# Altium PCB Pcb_SpectrumAnalyzer.PcbDoc
Units mil, origin at the board's own origin, x right, y up, seen from the top; angles counter-clockwise.
Board outline 10400 x 2900 mil, 2 copper layers (Top Layer, Bottom Layer); 75 components, 69 nets, 239 pads, 0 vias.
Unrouted connection lines stored in the file: 162.
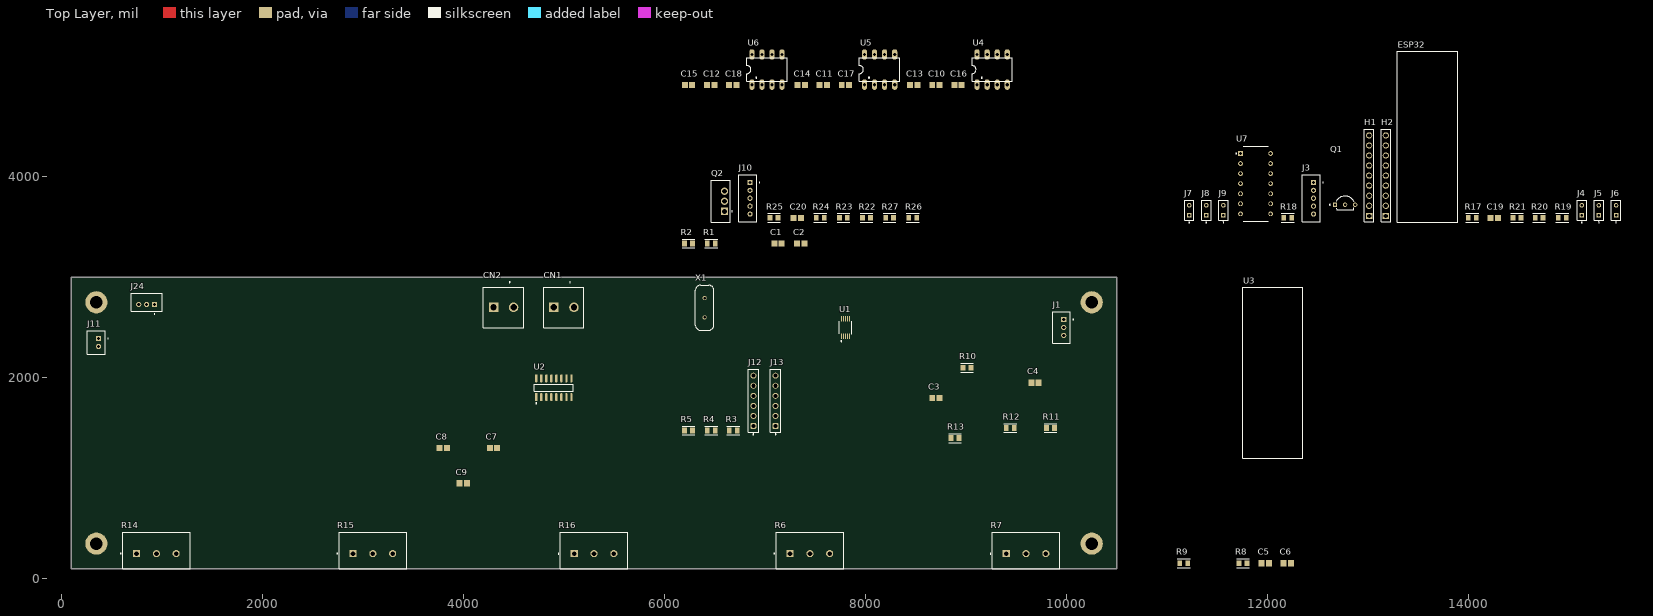
[diagram p0: Top Layer view]
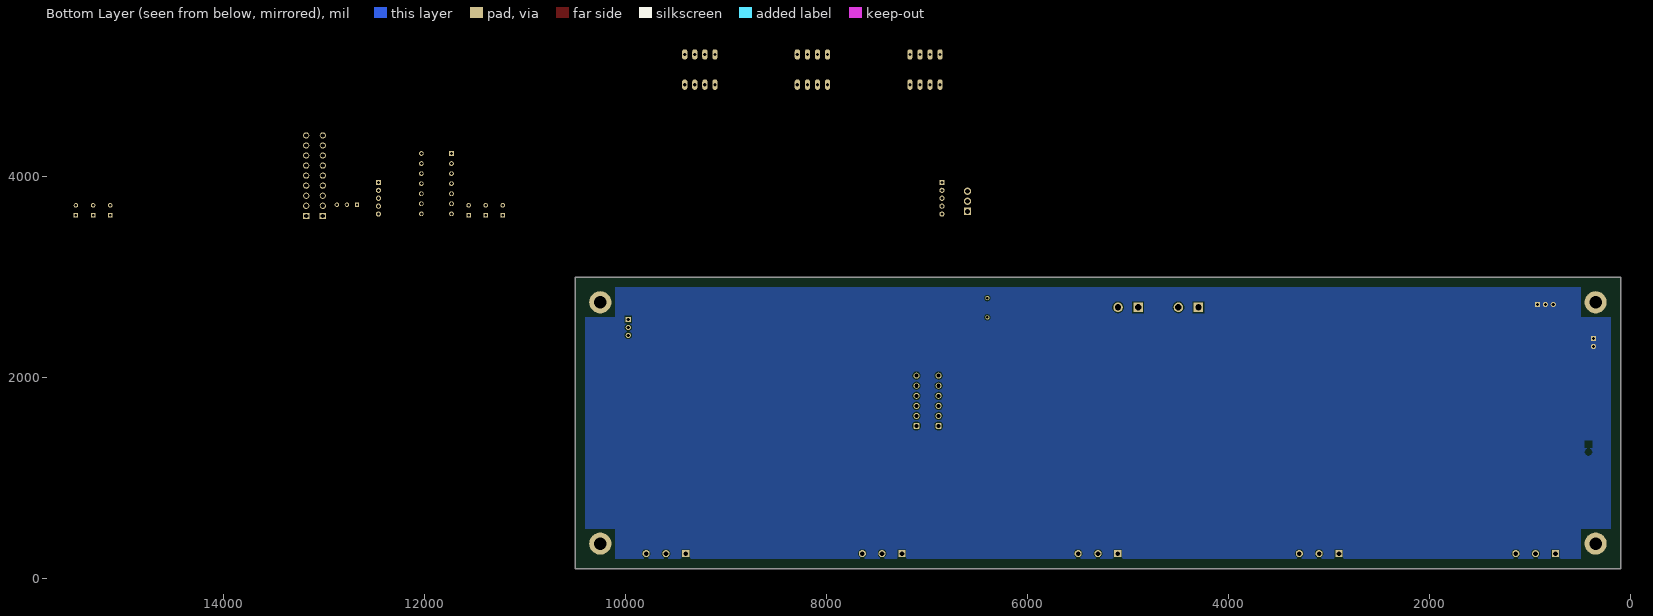
[diagram p1: Bottom Layer view, seen from below]

## Layer stack, top to bottom
Top Solder: solder mask 0.4, Solder Resist, Dk 3.5
Top Layer: signal copper 1.4
Dielectric 1: dielectric 12.6, FR-4, Dk 4.8
Bottom Layer: signal copper 1.4
Bottom Solder: solder mask 0.4, Solder Resist, Dk 3.5

## Board outline
100,100 10500,100 10500,3000 100,3000

## Design rules (kind name [scope] priority, off if disabled: settings)
Clearance [All] p1: gap=10 ignorepadtopadclearanceinfootprint=FALSE
PolygonConnect [All] p1: connectstyle=Relief reliefconductorwidth=10 reliefentries=4 polygonreliefangle="90 Angle" airgapwidth=10
RoutingVias [All] p1: holewidth=28 width=50 viastyle="Through Hole" minholewidth=28 minwidth=50 maxholewidth=28 maxwidth=50
SolderMaskExpansion [All] p1: expansion=4 istentingtop=FALSE
SupplyNets "Schematic Supply Nets_3" [InNet('3.3V')] p1: voltage=0.000
SupplyNets "Schematic Supply Nets_2" [InNet('AGND')] p2: voltage=0.000
SupplyNets "Schematic Supply Nets_1" [InNet('5V-MAIN')] p3: voltage=0.000
SupplyNets "Schematic Supply Nets" [InNet('5V')] p4: voltage=0.000
Width [All] p1: maxlimit=10 minlimit=10 preferedwidth=10
30 further rules are at their usual default settings.

## Classes and differential pairs
component class SpectrumAnalyzer: C10 C11 C12 C13 C14 C15 C16 C17 C18 U4 U5 U6
component class ESP32-Controls: C19 C20 ESP32 H1 H2 J3 J4 J5 J6 J7 J8 J9 J10 J11 J24 Q1 Q2 R14 R15 R16 R17 R18 R19 R20 R21 R22 R23 R24 R25 R26 R27 U7
component class ClockGenerator: C1 C2 R1 R2 U1 X1
component class BluetoothModule: J12 J13 R3 R4 R5 U3
component class AudioFrontend: C3 C4 C5 C6 C7 C8 C9 CN1 CN2 J1 R6 R7 R8 R9 R10 R11 R12 R13 U2

## Components (designator, comment, footprint, x,y, rotation, side; value= is the part's Value field where it differs from the comment)
C1 "470nF" SMD_CAPACITOR 7130,3335 r0 top
C2 "470nF" SMD_CAPACITOR 7355,3335 r0 top
C3 "0.47µF" SMD_CAPACITOR 8700,1800 r0 top
C4 "0.47µF" SMD_CAPACITOR 9686.42,1950 r0 top
C5 "0.1µF" SMD_CAPACITOR 11975,155 r0 top
C6 "1µF" SMD_CAPACITOR 12195,155 r0 top
C7 "1µF" SMD_CAPACITOR 4300,1300 r0 top
C8 "470µF" SMD_CAPACITOR 3800,1300 r0 top
C9 "1µF" SMD_CAPACITOR 4000,950 r0 top
C10 "100nF" SMD_CAPACITOR 8700,4910 r0 top
C11 "100nF" SMD_CAPACITOR 7580,4910 r0 top
C12 "100nF" SMD_CAPACITOR 6460,4910 r0 top
C13 "100nF" SMD_CAPACITOR 8480,4910 r0 top
C14 "100nF" SMD_CAPACITOR 7360,4910 r0 top
C15 "100nF" SMD_CAPACITOR 6240,4910 r0 top
C16 "10nF" SMD_CAPACITOR 8920,4910 r0 top
C17 "10nF" SMD_CAPACITOR 7800,4910 r0 top
C18 "10nF" SMD_CAPACITOR 6680,4910 r0 top
C19 "0.1µF" SMD_CAPACITOR 14255,3590 r0 top
C20 "0.1µF" SMD_CAPACITOR 7320,3590 r0 top
CN1 "1714955" SchroefConnector2P 4900,2700 r0 top
CN2 "1714955" SchroefConnector2P 4300,2700 r0 top
ESP32 "ESP32_Placeholder" ESP32_placeholder 13290,3545 r90 top
H1 "HeaderFemale9P" Header-9pins 13010,3610 r90 top
H2 "HeaderFemale9P" Header-9pins 13175,3610 r90 top
J1 "B3B-PH-K-S" Connector3P 9950,2500 r90 top
J3 "Mode_Button_RGB" Connector5P 12435,3785 r90 top
J4 "B" MaleHeader2P 15125,3665 r0 top
J5 "G" MaleHeader2P 15295,3665 r0 top
J6 "R" MaleHeader2P 15465,3665 r0 top
J7 "B" MaleHeader2P 11220,3665 r0 top
J8 "G" MaleHeader2P 11390,3665 r0 top
J9 "R" MaleHeader2P 11560,3665 r0 top
J10 "POWER_Button_BGR" Connector5P 6830,3785 r90 top
J11 "USB-C Connector" JST_B2B-PH-K-S 350,2350 r90 top
J12 "" HEADER-6PINS 6885,1770 r90 top
J13 "61300611821" HEADER-6PINS 7105,1770 r90 top
J24 "B3B-PH-K-S" Connector3P 850,2750 r0 top
Q1 "BC547C" Transistor 12770,3720 r0 top
Q2 "IRLZ44N" MOSFET 6560,3755 r90 top
R1 "10K" SMD_RESISTOR 6465,3335 r0 top value=681Ω
R2 "10K" SMD_RESISTOR 6240,3335 r0 top value=681Ω
R3 "51K" SMD_RESISTOR 6685,1475 r0 top value=681Ω
R4 "33K" SMD_RESISTOR 6465,1475 r0 top value=681Ω
R5 "10K" SMD_RESISTOR 6240,1475 r0 top value=681Ω
R6 "10K" POTENTIOMETER 7446.85,250 r0 top
R7 "10K" POTENTIOMETER 9596.85,250 r0 top
R8 "10K" SMD_RESISTOR 11755,155 r0 top value=681Ω
R9 "10K" SMD_RESISTOR 11165,155 r0 top value=681Ω
R10 "20K" SMD_RESISTOR 9010.55,2100 r0 top value=681Ω
R11 "20K" SMD_RESISTOR 9839.45,1500 r0 top value=681Ω
R12 "10K" SMD_RESISTOR 9439.45,1500 r0 top value=681Ω
R13 "10K" SMD_RESISTOR 8889.45,1400 r0 top value=681Ω
R14 "10K" POTENTIOMETER 946.85,250 r0 top
R15 "10K" POTENTIOMETER 3100,250 r0 top
R16 "10K" POTENTIOMETER 5300,250 r0 top
R17 "20K" SMD_RESISTOR 14035,3590 r0 top value=681Ω
R18 "1K" SMD_RESISTOR 12200,3590 r0 top value=681Ω
R19 "330" SMD_RESISTOR 14930,3590 r0 top value=681Ω
R20 "220" SMD_RESISTOR 14700,3590 r0 top value=681Ω
R21 "220" SMD_RESISTOR 14480,3590 r0 top value=681Ω
R22 "330" SMD_RESISTOR 8010,3590 r0 top value=681Ω
R23 "220" SMD_RESISTOR 7780,3590 r0 top value=681Ω
R24 "220" SMD_RESISTOR 7550,3590 r0 top value=681Ω
R25 "20K" SMD_RESISTOR 7090,3590 r0 top value=681Ω
R26 "100" SMD_RESISTOR 8470,3590 r0 top value=681Ω
R27 "100K" SMD_RESISTOR 8240,3590 r0 top value=681Ω
U1 "SI5351A-B-GTR" ClockGenerator 7800,2500 r90 top
U2 "PAM8403DR" PAM8403 4900,1900 r90 top
U3 "m18 BT audio in" ESP32_placeholder 12350,2900 r270 top
U4 "MSGEQ7" MSGEQ7 9260,5065 r0 top
U5 "MSGEQ7" MSGEQ7 8140,5065 r0 top
U6 "MSGEQ7" MSGEQ7 7020,5065 r0 top
U7 "74HC74N" 74HC74 11880,3930 r0 top
X1 "ABM8W-25.0000MHZ-8-D1X-T3" Crystal 6400,2696.06 r90 top

## Footprints (in the part's own frame and the unit in brackets; to place one, negate y for a bottom-side part, rotate by r counter-clockwise, add the part's x,y. Pads: shape width x height; smd on the part's side, far side on the other; paste and mask are expansions set on the pad)
74HC74 [mm] "DIP762W45P254L1950H420Q14"
  rect 1.19x1.19 hole 0.79: 1(-3.81,7.62)
  round 1.19 hole 0.79: 2(-3.81,5.08) 3(-3.81,2.54) 4(-3.81,0) 5(-3.81,-2.54) 6(-3.81,-5.08) 7(-3.81,-7.62) 8(3.81,-7.62) 9(3.81,-5.08) 10(3.81,-2.54) 11(3.81,0) 12(3.81,2.54) 13(3.81,5.08) 14(3.81,7.62)
  silkscreen extent -5,-9.51 3.17,9.51, body extent -4.72,-9.51 4.72,9.51, height 4.2
ClockGenerator [mm] "FP-SI5351A-B-GTR-MFG"
  rect 1.4x0.3 smd paste+0 mask+0: 1(-2.2,1) 2(-2.2,0.5) 3(-2.2,0) 4(-2.2,-0.5) 5(-2.2,-1) 6(2.2,-1) 7(2.2,-0.5) 8(2.2,0) 9(2.2,0.5) 10(2.2,1)
  silkscreen extent -3.57,-1.6 1.6,1.6, body extent -3,-1.7 3,1.7, height 0.25
Connector3P [mm] "JST_B3B-PH-K-S"
  rect 1.308x1.308 / inner round 1.308 / far side rect 1.308x1.308 hole 0.8: 1(2,-0.55)
  round 1.308 hole 0.8: 2(0,-0.55) 3(-2,-0.55)
  silkscreen extent -3.95,-3.05 3.95,2.25
Connector5P [mm] "JST_B5B-PH-K-S"
  rect 1.308x1.308 / inner round 1.308 / far side rect 1.308x1.308 hole 0.8: 1(4,-0.55)
  round 1.308 hole 0.8: 2(2,-0.55) 3(0,-0.55) 4(-2,-0.55) 5(-4,-0.55)
  silkscreen extent -5.95,-3.05 5.95,2.25
Crystal [mm] "XTAL_ECS250204XFDN"
  round 1.03 hole 0.63: 1(-2.44,0) 2(2.44,0)
  silkscreen extent -5.68,-2.33 5.68,2.33, body extent -5.68,-2.32 5.68,2.32, height 3.5
ESP32_placeholder [mil]
  silkscreen extent 0,-600 1700,0
HEADER-6PINS [mm] "Socket Header, Pitch 2.54 mm, THT, Vertical, single row, 6p"
  rrect50% 1.52x1.52 hole 1.02: 1(-6.35,0)
  round 1.52 hole 1.02: 2(-3.81,0) 3(-1.27,0) 4(1.27,0) 5(3.81,0) 6(6.35,0)
  silkscreen extent -8.6,-1.35 8,1.35, body extent -7.87,-1.25 7.87,1.25, height 8.55
Header-9pins [mm] "SMTC-SSW-112-01-X-S   SQ Post Socket, 1x12 Pins, Vertical, 2.54mm Pitch, Female"
  rect 1.55x1.55 hole 1.04: 1(0,0)
  round 1.55 hole 1.04: 2(2.54,0) 3(5.08,0) 4(7.62,0) 5(10.16,0) 6(12.7,0) 7(15.24,0) 8(17.78,0) 9(20.32,0)
  silkscreen extent -1.53,-1.2 21.84,1.2, body extent -1.55,-1.22 21.87,1.22, height 5
JST_B2B-PH-K-S [mm]
  rect 1.308x1.308 / inner round 1.308 / far side rect 1.308x1.308 hole 0.8: 1(1,-0.55)
  round 1.308 hole 0.8: 2(-1,-0.55)
  silkscreen extent -2.95,-3.05 2.95,2.25, body extent -2.95,-2.25 2.95,2.25, height 6
MaleHeader2P [mil] "SAMTEC_TD-101-X-A"
  rect 45x45 / inner round 45 / far side rect 45x45 hole 25: 01(0,-50)
  round 45 hole 25: 02(0,50)
  silkscreen extent -47,-124 47,100
MOSFET [mm] "TO254P1054X469X1930-3"
  rect 1.85x1.85 / inner round 1.85 / far side rect 1.85x1.85 hole 1.23: 1(-2.54,-0.94)
  round 1.85 hole 1.23: 2(0,-0.94) 3(2.54,-0.94)
  silkscreen extent -5.27,-2.96 5.27,2.35, body extent -5.08,-2.67 5.08,1.78, height 15.01
MSGEQ7 [mil] "DIL-08"
  oval 52x104 hole 32: 1(-150,-150) 2(-50,-150) 3(50,-150) 4(150,-150) 5(150,150) 6(50,150) 7(-50,150) 8(-150,150)
  silkscreen extent -200,-115 200,115
PAM8403 [mil] "FP-SO-16-IPC_B"
  rect 81.77x22.92 smd paste+0 mask+0: 1(-93.21,175)
  rrect100% 81.77x22.92 smd paste+0 mask+0: 2(-93.21,125) 3(-93.21,75) 4(-93.21,25) 5(-93.21,-25) 6(-93.21,-75) 7(-93.21,-125) 8(-93.21,-175) 9(93.21,-175) 10(93.21,-125) 11(93.21,-75) 12(93.21,-25) 13(93.21,25) 14(93.21,75) 15(93.21,125) 16(93.21,175)
  silkscreen extent -159,-195 33,195, body extent -144,-205 144,205, height 10
POTENTIOMETER [mm] "TRIM_WH148-1A-2-18T-L20"
  rect 1.8x1.8 / inner round 1.8 / far side rect 1.8x1.8 hole 1.2 mask+0.102: 1(-5,0)
  round 1.8 hole 1.2 mask+0.102: 2(0,0) 3(5,0)
  silkscreen extent -9.1,-3.8 8.5,5.4, body extent -8.5,-23.8 8.5,5.4, height 21
SchroefConnector2P [mm] "CUI_TB004-508-02BE"
  rect 2.4x2.4 / inner round 2.4 / far side rect 2.4x2.4 hole 1.6 mask+0.102: 1(0,0)
  round 2.4 hole 1.6 mask+0.102: 2(5.08,0)
  silkscreen extent -2.54,-5.1 7.62,6.45, body extent -2.59,-5.12 8.17,5.08, height 14.1
SMD_CAPACITOR [mm] "CAPC2013X145X48ML20T23Chip Capacitor, 2-Leads, Body 2.00x1.25mm, IPC Low Density"
  rect 1.5x1.55 smd: 1(-0.925,0) 2(0.925,0)
  body extent -1.1,-0.72 1.1,0.72, height 1.45
SMD_RESISTOR [mil] "FP-RT0805-IPC_A"
  rect 47.56x57.56 smd paste+0 mask+0: 1(-39.45,0) 2(39.45,0)
  silkscreen extent -63,-45 63,45, body extent -83,-48 83,48, height 10
Transistor [mm] "TRANS_BC547C"
  rect 1.108x1.108 / inner round 1.108 / far side rect 1.108x1.108 hole 0.6 mask+0.102: 1(-2.54,0)
  round 1.108 hole 0.6 mask+0.102: 2(0,0) 3(2.54,0)
  silkscreen extent -3.94,-1.27 2.2,2.33, body extent -2.74,-4.6 2.74,12.5, height 2.3

## Part data
C1 C2 C3 C4 C5 C6 C7 C8 C9 C10 C11 C12 C13 C14 C15 C16 C17 C18 C19 C20: library part "CER Capacitor", Manufacturer=Vitramon, Part Number=VJ0805Y682KXAMT
CN1 CN2: library part "schroefconnector 2 pins", "PC Terminal Block, Pitch 6.35 mm, 1 x 2 Position, Height 21.5 mm, Tail Lenght 5.1 mm, RoHS, Bulk", Manufacturer="Phoenix Contact", Package Description="PC Terminal Block, Pitch 6.35 mm, 1 x 2 Position, Height 21.5 mm, Tail Lenght 5.1 mm", Datasheet URL=http://media.digikey.com/pdf/Data%20Sheets/Phoenix%20Contact%20PDFs/1714955.pdf, Datasheet Version=02/2010, Manufacturer URL=http://www.phoenixcontact.com/, Mounting Technology=ThroughHole, Package Reference=1714955
J1 J24: library part Connector_3p, Package=None, Availability=Unavailable, MF="{'manufacturer': u'JST Sales America Inc.'}", MP=B3B-PH-K-S, Price=None
J3 J10: library part Connector_5p, "B5B-PH-K-S", Package=None, Availability=Unavailable, MF="{'manufacturer': u'JST Sales America Inc.'}", MP=B5B-PH-K-S, Price=None
J4 J5 J6 J7 J8 J9: library part Header_Male2p, "Variable Height PCB Header Strips, 0.100 pitch", Package=None, Check_prices=https://www.snapeda.com/parts/MTSW-101-09-L-D-210/Samtec/view-part/?ref=eda, MF=SAMTEC, MP=MTSW-101-09-L-D-210, SnapEDA_Link=https://www.snapeda.com/parts/MTSW-101-09-L-D-210/Samtec/view-part/?ref=snap
J11: library part Connector_2p, "Connector Header Through Hole 2 position 0.079 (2.00mm)B2B-PH-K-S", Package=None, Check_prices=https://www.snapeda.com/parts/B2B-PH-K-S/JST/view-part/?ref=eda, MF="JST Sales America Inc.", MP=B2B-PH-K-S, SnapEDA_Link=https://www.snapeda.com/parts/B2B-PH-K-S/JST/view-part/?ref=snap
J12 J13: library part Header_female6P, "THT Vertical Socket Header WR-PHD, Pitch 2.54 mm, Single Row, 6 pins", Contact Resistance=20mΩ, Current Rating=3A, Operating Supply Voltage=250V, Gender=Female, Lead Pitch=2.54mm, Number of Pins=6, Orientation=Vertical, RoHS=Compliant
Q1: "BJT, TO-92, 45V, 100mA, NPN, 0.5W, 150Â°C", Package=TO-92, Availability=Unavailable, Check_prices=https://www.snapeda.com/parts/BC547C/Diotec/view-part/?ref=eda, MF="Diotec Semiconductor", MP=BC547C, Price=None, SnapEDA_Link=https://www.snapeda.com/parts/BC547C/Diotec/view-part/?ref=snap
Q2: "N-Channel 55 V 47A (Tc) 3.8W (Ta), 110W (Tc) Surface Mount D2PAK", Package="TO-220-3 Infineon / IR", Availability="Not in stock", Check_prices=https://www.snapeda.com/parts/IRLZ44N/Infineon/view-part/?ref=eda, MF="Infineon / IR", MP=IRLZ44N, Price=None, SnapEDA_Link=https://www.snapeda.com/parts/IRLZ44N/Infineon/view-part/?ref=snap
R1 R2 R3 R4 R5 R8 R9 R10 R11 R12 R13 R17 R18 R19 R20 R21 R22 R23 R24 R25 R26 R27: library part Resistor, "RES SMD 681 OHM 0.1% 1/8W 0805", Manufacturer=Yageo, Manufacturer Part Number=RT0805BRD07681RL, Package=RT0805, Power Rating=0.125W, Resistance=681Ω, Temperature="-55°C to +155°C", Temperature Coefficient="25 ppm/°C", Temperature Range High=+155°C, Temperature Range Low=-55°C, Tolerance=0.0025, Voltage Rating=150V, Automotive=No, Category=Res, ComponentLink2Description=Datasheet, ComponentLink2URL=http://www.yageo.com/documents/recent/PYu-RT_1-to-0.01_RoHS_L_9.pdf, Composition="Thin Film", Device Class L1="Passive Components", Device Class L2=Resistors, Device Class L3="Chip SMD Resistors", Digikey Description="RES SMD 681 OHM 0.1% 1/8W 0805", Footprint Url=http://www.yageo.com/exep/pages/download/literatures/PYu-R_Mount_10.pdf, Height=0.6mm, Ipc Land Pattern Name=RESC200125X50, Lead Free=Yes, Mouser Description="Thin Film Resistors - SMD 1/8W 681 ohm .1% 25ppm", Octopart=https://octopart.com/rt0805brd07681rl-yageo-1270194, RoHS=TRUE, Series=RT
R6 R7 R14 R15 R16: library part Potmeter, "16mm Rotary Potentiometers / WH148-1A-2-18T-L20", Package=Package, Check_prices=https://www.snapeda.com/parts/WH148-1A-2-18T-L20/Kls+electronics/view-part/?ref=eda, MF="Kls electronics", MP=WH148-1A-2-18T-L20, SnapEDA_Link=https://www.snapeda.com/parts/WH148-1A-2-18T-L20/Kls+electronics/view-part/?ref=snap
U1: library part "Clock Generator", "IC CLK GENERATOR 200MHZ 10MSOP", Case/Package=MSOP, Max Frequency=200MHz, Max Operating Temperature=85°C, Min Operating Temperature=-40°C, Operating Supply Current=22mA, Operating Supply Voltage=3.3V, Package Quantity=2500, Input=Crystal, Max Duty Cycle=55%, Mount="Surface Mount", Number of Circuits=2, Number of Outputs=3, Number of Pins=10, Packaging="Tape and Reel", PLL=Yes, RoHS Compliant=Yes, Series=MultiSynth™
U2: library part Pam8403, "IC AMP CLASS D STEREO 3W 16SOP", Manufacturer="Diodes Inc.", Max Junction Temp=+125°C, Max Supply Voltage=5.5V, Min Supply Voltage=2.5V, Nominal Supply Current=8-16mA, Package=SO-16, Power At Speaker R="3.2W @ 4Ω", Temperature="-40°C to +85°C", Temperature Range High=+85°C, Temperature Range Low=-40°C, Automotive=No, Category=IC, ComponentLink2Description=Datasheet, ComponentLink2URL=https://www.diodes.com/assets/Datasheets/PAM8403.pdf, Device Class L1="Integrated Circuits (ICs)", Device Class L2="Linear ICs", Device Class L3="Amplifiers - Audio", Digikey Description="IC AMP CLASS D STEREO 3W 16SOP", Footprint Url=https://www.diodes.com/assets/Package-Files/SO-16.pdf, Height=1.26mm, Ipc Land Pattern Name=SOIC127P600X119-16, Lead Free=Yes, Manufacturer Part Number=PAM8403DR, Mouser Description="PAM8403 Series 5.5 V 3 W Filterless Class-D Stereo Audio Amplifier - SOIC-16", Number Of Channels=2, Octopart=https://octopart.com/pam8403dr-diodes+inc.-29030487, RoHS=TRUE, Standoff Height=0.1mm
U3: library part "Bluetooth Module", "Bluetooth module"
U4 U5 U6: "MSGEQ7 Signal Level Control Interface Arduino Platform Evaluation Expansion Board", Package="SOIC-8 Mixed Signal Integration", Availability=Unavailable, MF="SparkFun Electronics", MP=MSGEQ7, Price=None, SnapEDA_Link=https://www.snapeda.com/parts/MSGEQ7/SparkFun%20Electronics/view-part/106617/?ref=snap
U7: library part 74HC74N,652, "D FLIP-FLOP", Package=None, Availability=Warning, Check_prices=https://www.snapeda.com/parts/74HC74N,652/Rochester%20Electronics/view-part/5010421/?ref=eda, MF="Rochester Electronics, LLC", MP=74HC74N,652, Price=None, Purchase-URL=https://pricing.snapeda.com/search/part/74HC74N,652/?ref=eda, SnapEDA_Link=https://www.snapeda.com/parts/74HC74N,652/Rochester%20Electronics/view-part/5010421/?ref=snap
X1: library part Crystal, "Crystal 25.0000Mhz 8Pf Smd Rohs Compliant: Yes", Digikey Part Number=535-14059-1-ND, Frequency=25MHz, Load Capacitance=8pF, Manufacturer=Abracon, Mouser Part Number=815-8W25-8D1XT, Package=ABM8W, Temperature="-40°C to +85°C", Temperature Range High=+85°C, Temperature Range Low=-40°C, Tolerance=10ppm, Automotive=No, ComponentLink1Description=Upverter, ComponentLink1URL=https://upverter.com/part/id/6105b10e08f999b5/, ComponentLink2Description="Datasheet URL", ComponentLink2URL=https://abracon.com/datasheets/ABM8W.pdf, Datasheet Date=2022-07-11, Digikey Description="CRYSTAL 25.0000MHZ 8PF SMD", Esr=50Ω, Height=0.75mm, HelpURL=https://abracon.com/datasheets/ABM8W.pdf, Lead Free=Yes, Mouser Description="Crystal 25.0000Mhz 8Pf Smd Rohs Compliant: Yes |Abracon ABM8W-25.0000MHZ-8-D1X-T3", Part Number=ABM8W-25.0000MHZ-8-D1X-T3, RoHS=Compliant, Schedule B=8541600080, Series=ABM8W, Stability=20ppm, Supplier 1=Digi-Key, Supplier 2=Mouser, Supplier Part Number 1=535-14059-1-ND, Supplier Part Number 2=815-8W25-8D1XT, Symbol Hash=5ad2309f83030e0db84e76142195c3471039205ed86bf5db55117304b0c05392, Verification Version=0.0.0.3

## Free pads (board coordinates)
  round 220 hole 125 unplated: 4(350,350) 4(350,2750) 4(10250,350) 4(10250,2750)

## Nets (pads, with @x,y where several pads share a name; then routed paths per layer and width w, separated by ;. In a path a pad name is that pad's centre, name@x,y a point inside that pad or via, vN(x,y) a via of type N, cw(c..) or ccw(c..) an arc to the next point about the centre after c; other vN are vias at no path point)
3.3V: C1.1 C2.1 C13.2 C14.2 C15.2 H1.3 J3.1 R1.2 R2.2 R14.3 R15.3 R16.3 U1.1 U1.7 U4.1 U5.1 U6.1 U7.1 U7.4 U7.10 U7.13
5V: C6.1 C7.1 C8.1 C9.1 H1.1 J12.1 J13.4 J24.1 Q2.3 R12.2 R13.2 U2.4 U2.6 U2.13
5V-MAIN: J10.1 J11.1 Q2.2 U7.14
AGND: C1.2 C2.2 C5.1 C6.2 C7.2 C8.2 C9.2 C10.1 C11.1 C12.1 C13.1 C14.1 C15.1 C19.1 C20.1 H1.2 J1.3 J4.01 J5.01 J6.01 J7.01 J8.01 J9.01 J11.2 J12.2 J13.3 J24.3 Q1.3 R6.3 R7.3 R14.1 R15.1 R16.1 R17.1 R25.1 R27.1 U1.8 U2.2 U2.9 U2.11 U2.15 U4.2 U5.2 U6.2
DGND: 
GND: 
NetC3_1: C3.1 R10.2
NetC3_2: C3.2 R6.2
NetC4_1: C4.1 R11.2
NetC4_2: C4.2 R7.2
NetC5_2: C5.2 U2.8
NetC10_2: C10.2 U4.6
NetC11_2: C11.2 U5.6
NetC12_2: C12.2 U6.6
NetC16_1: C16.1 U4.5
NetC16_2: C16.2 C17.2 C18.2 R8.2 R9.2
NetC17_1: C17.1 U5.5
NetC18_1: C18.1 U6.5
NetC19_2: C19.2 J3.5 R17.2 U7.3
NetC20_2: C20.2 J10.5 R25.2 U7.11
NetCN1_1: CN1.1 U2.1
NetCN1_2: CN1.2 U2.3
NetCN2_1: CN2.1 U2.16
NetCN2_2: CN2.2 U2.14
NetH1_4: H1.4 R1.1 U1.5
NetH1_5: H1.5 R2.1 U1.4
NetH1_6: H1.6 J24.2
NetH1_8: H1.8 U4.7 U5.7 U6.7
NetH1_9: H1.9 U4.4 U5.4 U6.4
NetH2_1: H2.1 U4.3
NetH2_2: H2.2 U5.3
NetH2_3: H2.3 U6.3
NetH2_4: H2.4 R16.2
NetH2_5: H2.5 R15.2
NetH2_6: H2.6 R14.2
NetH2_7: H2.7 Q1.1
NetJ1_1: J1.1 J13.2 R6.1 R8.1
NetJ1_2: J1.2 J13.1 R7.1 R9.1
NetJ3_2: J3.2 R19.2
NetJ3_3: J3.3 R20.2
NetJ3_4: J3.4 R21.2
NetJ4_02: J4.02 R21.1
NetJ5_02: J5.02 R20.1
NetJ6_02: J6.02 R19.1
NetJ7_02: J7.02 R24.1
NetJ8_02: J8.02 R23.1
NetJ9_02: J9.02 R22.1
NetJ10_2: J10.2 R22.2
NetJ10_3: J10.3 R23.2
NetJ10_4: J10.4 R24.2
NetJ12_4: J12.4 R3.1
NetJ12_5: J12.5 R4.1
NetJ12_6: J12.6 R5.1
NetJ13_6: J13.6 R3.2 R4.2 R5.2
NetQ1_2: Q1.2 R18.1
NetQ2_1: Q2.1 R26.1 R27.2
NetR10_1: R10.1 U2.7
NetR11_1: R11.1 U2.10
NetR12_1: R12.1 U2.5
NetR13_1: R13.1 U2.12
NetR18_2: R18.2 U7.5
NetR26_2: R26.2 U7.9
NetU1_2: U1.2 X1.1
NetU1_3: U1.3 X1.2
NetU1_6: U1.6 U6.8
NetU1_9: U1.9 U5.8
NetU1_10: U1.10 U4.8
NetU7_2: U7.2 U7.6
NetU7_8: U7.8 U7.12
pads on no net: H1.7 H2.8 H2.9 J12.3 J13.5 U7.7

## Polygon pours and split planes (outlines as drawn)
GND on Bottom Layer "GND_L02_P000" (solid, pour order 0): 500,2900 500,2600 200,2600 200,500 500,500 500,200 10100,200 10100,500 10400,500 10400,2600 10100,2600 10100,2900